# EAGLE board Board2 (EAGLE 7.5.0)
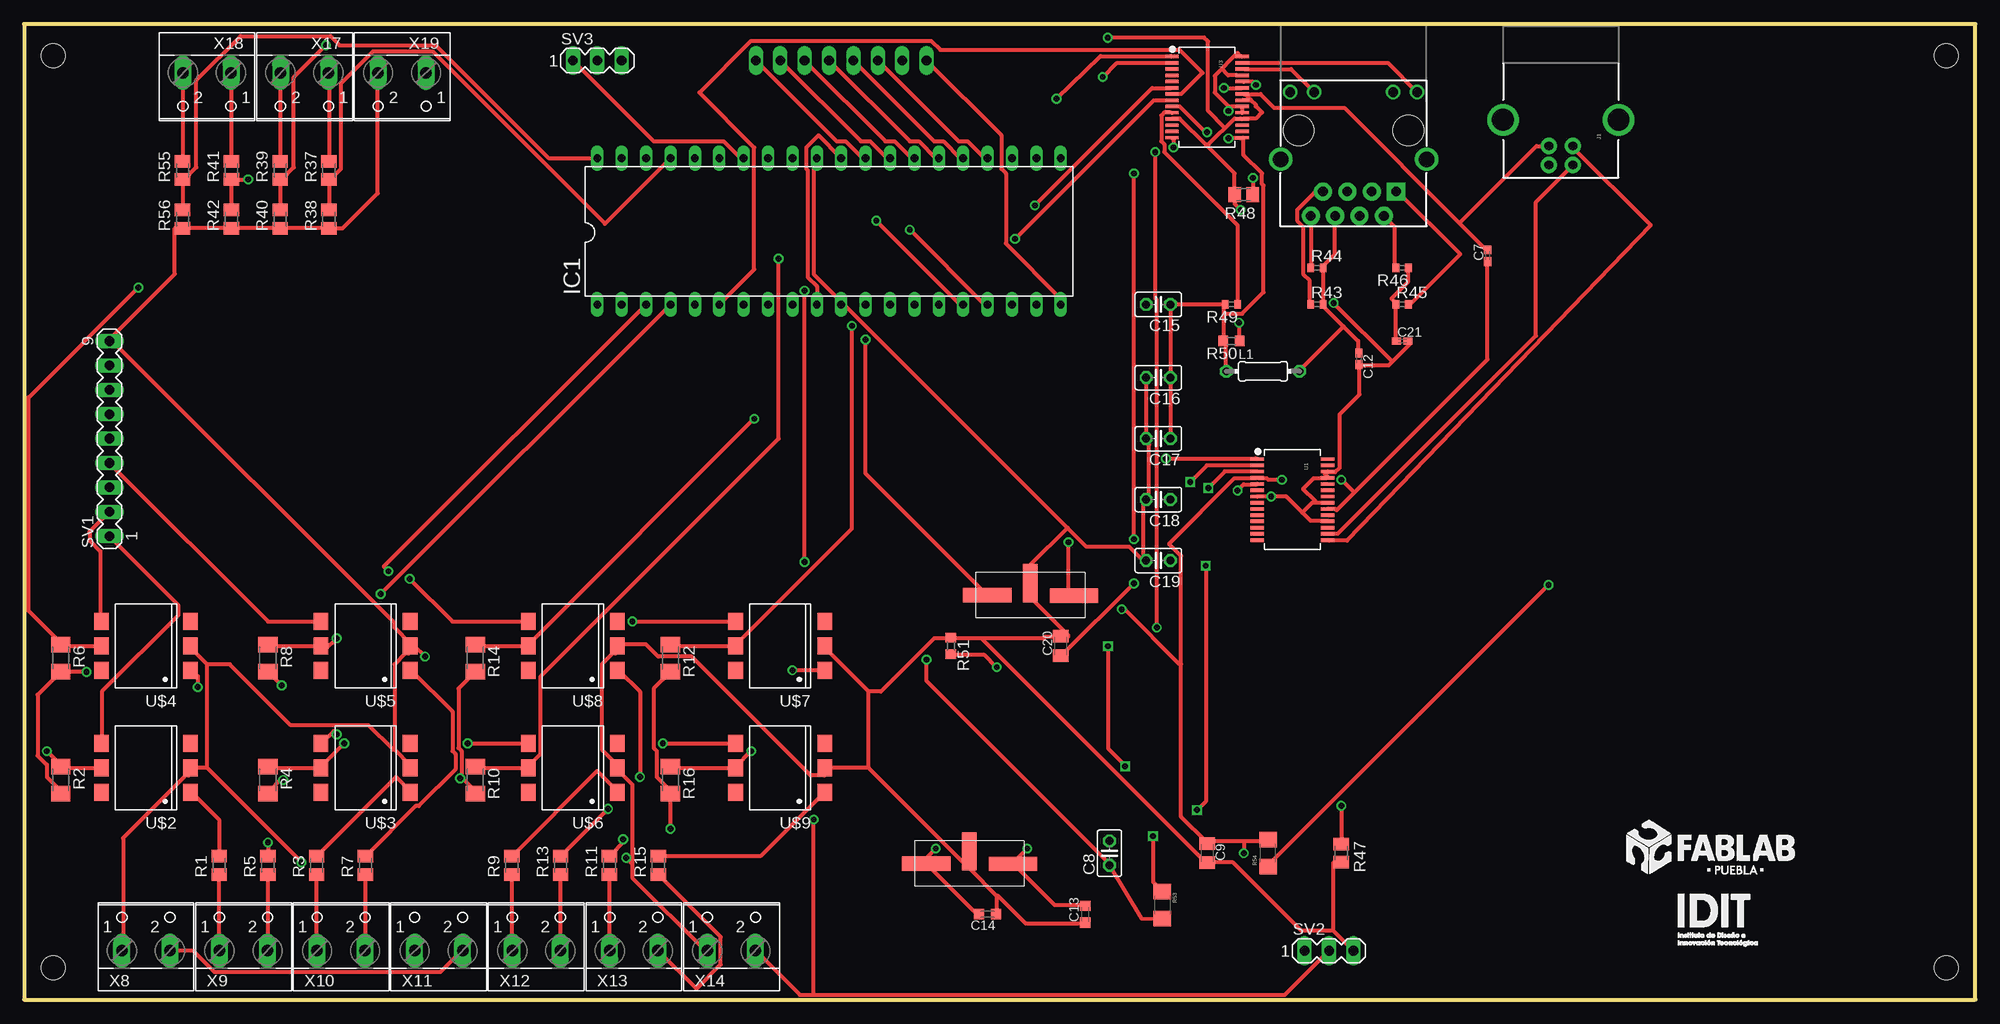
[diagram p0: board, top side]
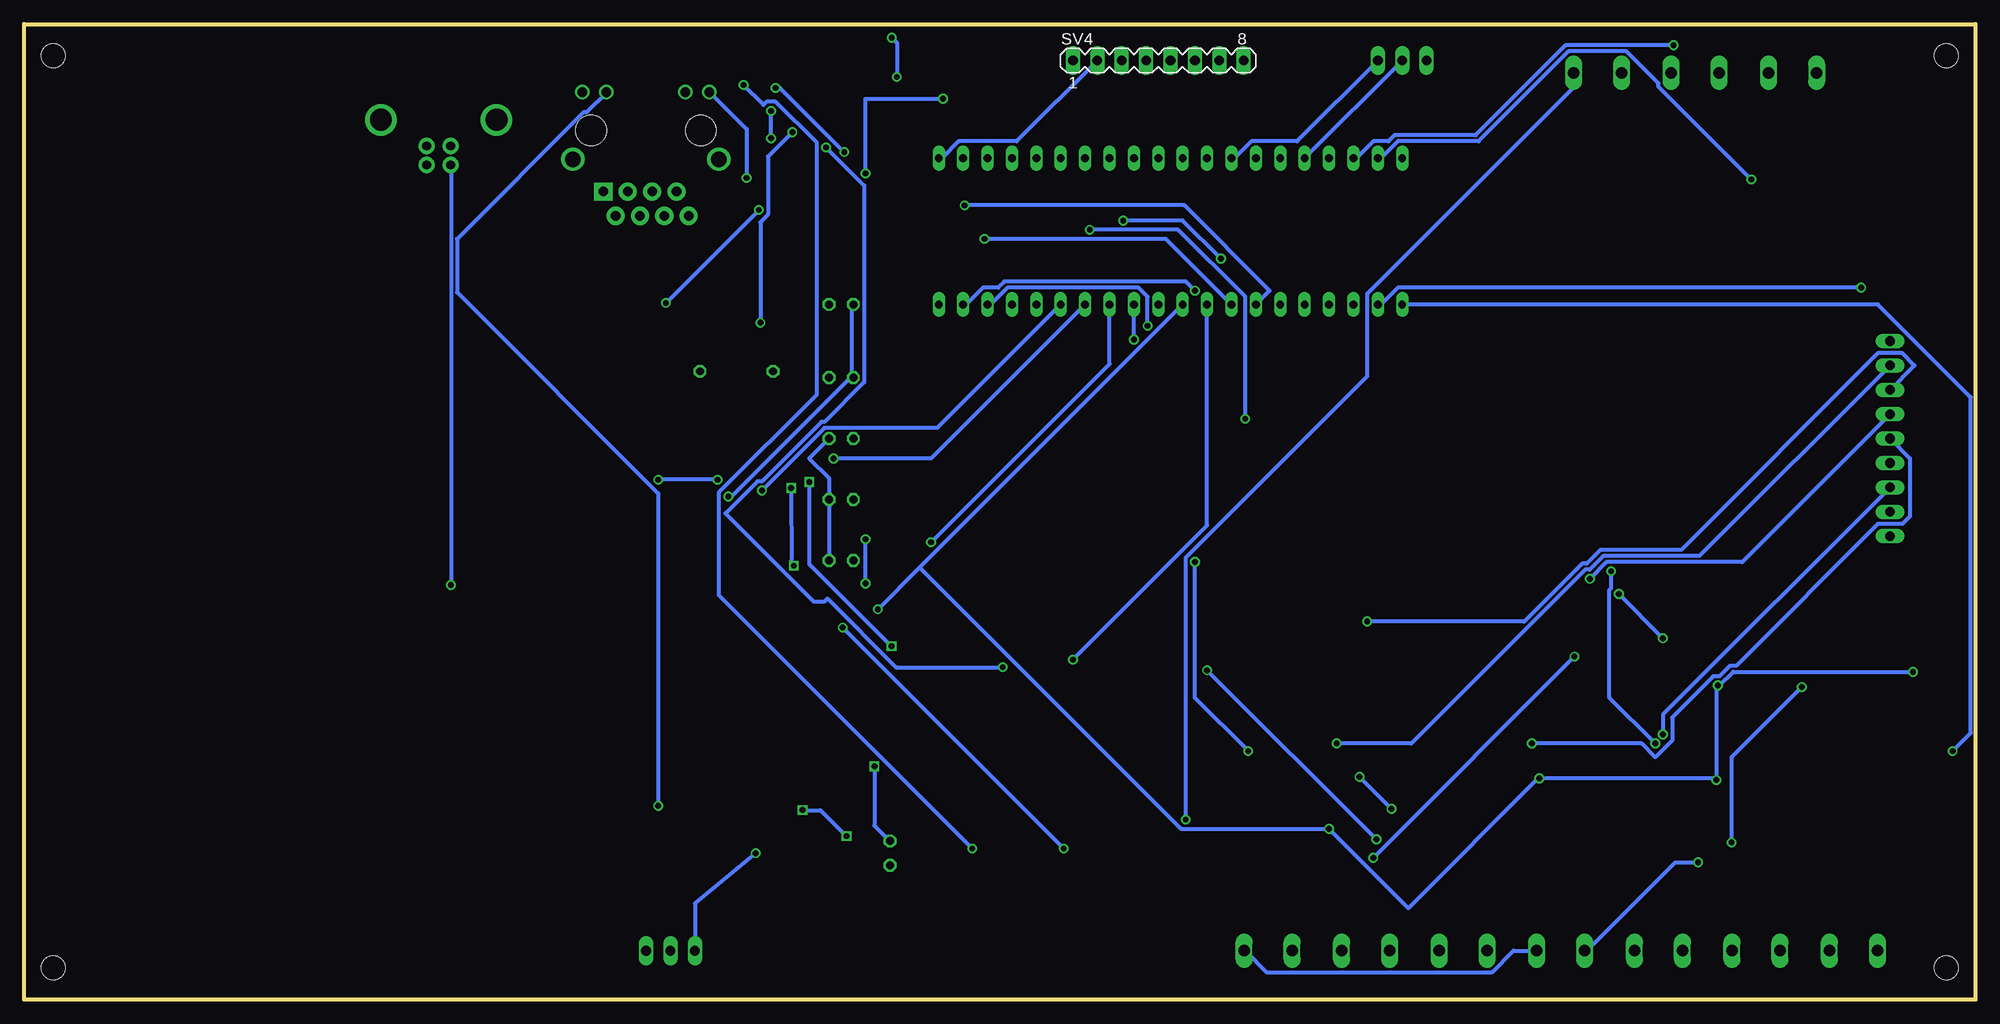
[diagram p1: board, bottom side, seen from below]

Size 203.2 x 101.6 mm. Coordinates in mm from the lower left corner, seen from the top.
Outline: 0,0 203.2,0 203.2,101.6 0,101.6 0,0
Copper layers (1*16): Top 0.035mm / dielectric 1.5mm / Bottom 0.035mm
Design rules "default *": minimum track width 16mil, minimum drill 24mil, track to track 8mil, track to pad 8mil, pad to pad 8mil, via to via 8mil, smd to smd 8mil, copper to edge 2mil, drill to drill 8mil, minimum pad ring 10mil, minimum via ring 8mil, stop-mask expansion 4mil, vias tented up to drill 0mil, thermal gap 10mil
Holes 2.5 mm at 3.05,3.3 3.05,98.3 200.15,3.3 200.15,98.3

## Footprints (pad centres in the part's own frame; a part is rotated, then mirrored left to right if it is on the bottom)
C0402K = smd 0.925 x 0.74: 1 -0.6,0; 2 0.6,0
C025-025X050 = drill 0.813 octagon: 1 -1.27,0; 2 1.27,0
C0805K = smd 1.3 x 1.6: 1 -1,0; 2 1,0
C0603K = smd 1.05 x 1.08: 1 -0.875,0; 2 0.875,0
SMDCRYSTAL = smd 5 x 1.5: 1 1.15,2.38; 2 10.19,2.35 | smd 1.5 x 4: GND 5.7,1.08
DIL40 = drill 0.813 long: 1 -24.13,-7.62; 2 -21.59,-7.62; 3 -19.05,-7.62; 4 -16.51,-7.62; 5 -13.97,-7.62; 6 -11.43,-7.62; 7 -8.89,-7.62; 8 -6.35,-7.62; 9 -3.81,-7.62; 10 -1.27,-7.62; 11 1.27,-7.62; 12 3.81,-7.62; 13 6.35,-7.62; 14 8.89,-7.62; 15 11.43,-7.62; 16 13.97,-7.62; 17 16.51,-7.62; 18 19.05,-7.62; 19 21.59,-7.62; 20 24.13,-7.62; 21 24.13,7.62; 22 21.59,7.62; 23 19.05,7.62; 24 16.51,7.62; 25 13.97,7.62; 26 11.43,7.62; 27 8.89,7.62; 28 6.35,7.62; 29 3.81,7.62; 30 1.27,7.62; 31 -1.27,7.62; 32 -3.81,7.62; 33 -6.35,7.62; 34 -8.89,7.62; 35 -11.43,7.62; 36 -13.97,7.62; 37 -16.51,7.62; 38 -19.05,7.62; 39 -21.59,7.62; 40 -24.13,7.62
USB-B-PTH = drill 0.914 pad 1.676: D+ 0,1.25; D- 1.981,1.25; GND 0,-1.25; VBUS 1.981,-1.25 | drill 2.286: S1 -2.718,-6.02; S2 -2.718,6.02
MAGJACK = drill 1 pad 1.88 square: 1 3.175,17.445 | drill 1 pad 1.88: 2 4.445,19.985; 3 5.715,17.445; 4 6.985,19.985; 5 8.255,17.445; 6 9.525,19.985; 7 10.795,17.445; 8 12.065,19.985 | drill 1 pad 1.27: 9 1,7.1; 10 3.5,7.1; 11 11.7,7.1; 12 14.2,7.1 | drill 1.6 pad 2.184: M1 0,14.1; M2 15.2,14.1 | hole 3.2: 1.905,11.095; 13.335,11.095
0204/7 = drill 0.813 octagon: 1 -3.81,0; 2 3.81,0
M0805 = smd 1.3 x 1.6: 1 -0.95,0; 2 0.95,0
M1206 = smd 1.6 x 2: 1 -1.4,0; 2 1.4,0
R0402 = smd 0.7 x 0.9: 1 -0.65,0; 2 0.65,0
R0603 = smd 1 x 1.1: 1 -0.85,0; 2 0.85,0
1206 = smd 1.6 x 1.8: 1 -1.4,0; 2 1.4,0
MA09-1 = drill 1.016 long: 1 -10.16,0; 2 -7.62,0; 3 -5.08,0; 4 -2.54,0; 5 0,0; 6 2.54,0; 7 5.08,0; 8 7.62,0; 9 10.16,0
MA03-1 = drill 1.016 long: 1 -2.54,0; 2 0,0; 3 2.54,0
MA08-1 = drill 1.016 long: 1 -8.89,0; 2 -6.35,0; 3 -3.81,0; 4 -1.27,0; 5 1.27,0; 6 3.81,0; 7 6.35,0; 8 8.89,0
SSOP28DB = smd 0.348 x 1.397: 1 -4.225,-3.656; 2 -3.575,-3.656; 3 -2.925,-3.656; 4 -2.275,-3.656; 5 -1.625,-3.656; 6 -0.975,-3.656; 7 -0.325,-3.656; 8 0.325,-3.656; 9 0.975,-3.656; 10 1.625,-3.656; 11 2.275,-3.656; 12 2.925,-3.656; 13 3.575,-3.656; 14 4.225,-3.656; 15 4.225,3.656; 16 3.575,3.656; 17 2.925,3.656; 18 2.275,3.656; 19 1.625,3.656; 20 0.975,3.656; 21 0.325,3.656; 22 -0.325,3.656; 23 -0.975,3.656; 24 -1.625,3.656; 25 -2.275,3.656; 26 -2.925,3.656; 27 -3.575,3.656; 28 -4.225,3.656
DIL6-SMD = smd 1.78 x 1.52: 1 -2.54,-4.645; 2 0,-4.645; 3 2.54,-4.645; 4 2.54,4.645; 5 0,4.645; 6 -2.54,4.645
W237-102 = drill 1.194 long: 1 -2.5,-1.27; 2 2.5,-1.27

## Placement (x,y rotation side)
C7  .1uF  [C0402K]  152.4,77.47 90 top
C8  100nF  [C025-025X050]  113.03,15.24 90 top
C9  10uF  [C0805K]  123.19,15.24 270 top
C12  10nF  [C0402K]  139.01,66.73 270 top
C13  10pF  [C0603K]  110.49,8.89 90 top
C14  10pF  [C0603K]  100.33,8.89 180 top
C15  [C025-025X050]  118.11,72.39 180 top
C16  100nF  [C025-025X050]  118.11,64.77 180 top
C17  100nF  [C025-025X050]  118.11,58.42 180 top
C18  100nF  [C025-025X050]  118.11,52.07 180 top
C19  100nF  [C025-025X050]  118.11,45.72 180 top
C20  10uF  [C0805K]  107.95,36.83 90 top
C21  10nF  [C0402K]  143.51,68.58 0 top
CRYSTAL  16MHz  [SMDCRYSTAL]  110.49,44.45 180 top
CRYSTAL2  25MHz  [SMDCRYSTAL]  104.14,16.51 180 top
IC1  [DIL40]  83.82,80.01 0 top
J1  USB-B  [USB-B-PTH]  160.02,88.9 270 top
J2  MAGJACK  [MAGJACK]  146.05,101.6 180 top
L1  10uH  [0204/7]  129.01,65.43 0 top
R1  470Ω  [M0805]  20.32,13.97 90 top
R2  4.7kΩ  [M1206]  3.81,22.86 270 top
R3  470Ω  [M0805]  30.48,13.97 90 top
R4  4.7kΩ  [M1206]  25.4,22.86 270 top
R5  470Ω  [M0805]  25.4,13.97 90 top
R6  4.7kΩ  [M1206]  3.81,35.56 270 top
R7  470Ω  [M0805]  35.56,13.97 90 top
R8  4.7kΩ  [M1206]  25.4,35.56 270 top
R9  470Ω  [M0805]  50.8,13.97 90 top
R10  4.7kΩ  [M1206]  46.99,22.86 270 top
R11  470Ω  [M0805]  60.96,13.97 90 top
R12  4.7kΩ  [M1206]  67.31,35.56 270 top
R13  470Ω  [M0805]  55.88,13.97 90 top
R14  4.7kΩ  [M1206]  46.99,35.56 270 top
R15  470Ω  [M0805]  66.04,13.97 90 top
R16  4.7kΩ  [M1206]  67.31,22.86 270 top
R37  1.8kΩ  [M0805]  31.75,86.36 90 top
R38  470Ω  [M0805]  31.75,81.28 90 top
R39  1.8kΩ  [M0805]  26.67,86.36 90 top
R40  470Ω  [M0805]  26.67,81.28 90 top
R41  1.8kΩ  [M0805]  21.59,86.36 90 top
R42  470Ω  [M0805]  21.59,81.28 90 top
R43  49.9/1%  [R0402]  134.62,72.39 0 top
R44  49.9/1%  [R0402]  134.62,76.2 0 top
R45  49.9/1%  [R0402]  143.51,72.39 0 top
R46  49.9/1%  [R0402]  143.51,76.2 180 top
R47  180Ω  [M0805]  137.16,15.24 270 top
R48  180Ω  [M0805]  127,83.82 180 top
R49  10kΩ  [R0402]  125.73,72.39 180 top
R50  100kΩ  [R0603]  125.73,68.58 180 top
R51  2k/1%  [R0603]  96.52,36.83 270 top
R53  100  [1206]  118.52,9.83 270 top
R54  0.0  [1206]  129.54,15.24 90 top
R55  1.8kΩ  [M0805]  16.51,86.36 90 top
R56  470Ω  [M0805]  16.51,81.28 90 top
SV1  [MA09-1]  8.89,58.42 90 top
SV2  [MA03-1]  135.89,5.08 0 top
SV3  [MA03-1]  59.69,97.79 0 top
SV4  [MA08-1]  85.09,97.79 0 bottom
U1  FT232RLSSOP  [SSOP28DB]  132.08,52.07 270 top
U3  [SSOP28DB]  123.19,93.98 270 top
U$2  CNY17SMD  [DIL6-SMD]  12.7,24.13 90 top
U$3  CNY17SMD  [DIL6-SMD]  35.56,24.13 90 top
U$4  CNY17SMD  [DIL6-SMD]  12.7,36.83 90 top
U$5  CNY17SMD  [DIL6-SMD]  35.56,36.83 90 top
U$6  CNY17SMD  [DIL6-SMD]  57.15,24.13 90 top
U$7  CNY17SMD  [DIL6-SMD]  78.74,36.83 90 top
U$8  CNY17SMD  [DIL6-SMD]  57.15,36.83 90 top
U$9  CNY17SMD  [DIL6-SMD]  78.74,24.13 90 top
X8  [W237-102]  12.7,6.35 0 top
X9  [W237-102]  22.86,6.35 0 top
X10  [W237-102]  33.02,6.35 0 top
X11  [W237-102]  43.18,6.35 0 top
X12  [W237-102]  53.34,6.35 0 top
X13  [W237-102]  63.5,6.35 0 top
X14  [W237-102]  73.66,6.35 0 top
X17  [W237-102]  29.21,95.25 180 top
X18  [W237-102]  19.05,95.25 180 top
X19  [W237-102]  39.37,95.25 180 top

## Library data of the parts
C7-C9 C12-C21 L1 R1-R16 R37-R51 R55 R56 = resistor
CRYSTAL CRYSTAL2 = crystal
IC1 = 1284p
J1 = SparkFun-Connectors; PROD_ID: CONN-08278
J2 = SparkFun-Connectors
R53 R54 = SparkFun-Resistors
SV1-SV4 = con-lstb; OC_FARNELL: unknown; OC_NEWARK: unknown
U1 = SparkFun-DigitalIC; PROD_ID: IC-00870
U3 = SparkFun-DigitalIC
U$2-U$9 = optocoupler
X8-X14 X17-X19 = con-wago-500; MPN: 237-102; OC_FARNELL: unknown; OC_NEWARK: 70K9898

## Nets
3.3V: C15.1 C16.1 C17.1 C18.1 C19.1 L1.1 R49.2 R50.2 U3.15 U3.19 U3.20 U3.28
5V: C7.1 C9.1 IC1.10 IC1.30 R2.2 R4.2 R6.2 R8.2 R10.2 R12.2 R14.2 R16.2 R54.2 SV2.1 U1.4 U1.20
24V: SV2.2 X8.2 X11.2 X14.2 X19.1
A0: R37.2 X17.1
A1: R39.2 X17.2
A2: R41.2 X18.1
A3: R55.2 X18.2
AA0: IC1.37 R37.1 R38.2
AA1: IC1.38 R39.1 R40.2
AA2: IC1.39 R41.1 R42.2
AA3: IC1.40 R55.1 R56.2
CLKOUT: U3.3
CS: R50.1 U3.9
CTS: U1.11
DI0: IC1.1 R2.1 U$2.5
DI1: IC1.2 R6.1 U$4.5
DI2: IC1.3 R4.1 U$3.5
DI3: IC1.4 R8.1 U$5.5
DI4: IC1.16 R10.1 U$6.5
DI5: IC1.17 R14.1 U$8.5
DI6: IC1.18 R12.1 U$7.5
DI7: IC1.19 R16.1 U$9.5
DO0: IC1.20 SV4.1
DO1: IC1.21 SV4.2
DO2: IC1.24 SV4.3
DO3: IC1.25 SV4.4
DO4: IC1.26 SV4.5
DO5: IC1.27 SV4.6
DO6: IC1.28 SV4.7
DO7: IC1.29 SV4.8
GND: C7.2 C9.2 C12.2 C13.1 C14.1 C15.2 C16.2 C17.2 C18.2 C19.2 C20.2 C21.2 CRYSTAL2.GND CRYSTAL.GND IC1.11 IC1.31 J1.GND R38.1 R40.1 R42.1 R47.2 R48.2 R51.1 R56.1 SV1.9 SV2.3 U1.7 U1.18 U1.21 U1.25 U1.26 U3.11 U3.18 U3.21 U3.22 U$2.2 U$3.2 U$4.2 U$5.2 U$6.2 U$7.2 U$8.2 U$9.2 X8.1 X11.1 X14.1 X19.2
IN0: R1.1 X9.1
IN1: R5.1 X9.2
IN2: R3.1 X10.1
IN3: R7.1 X10.2
IN4: R9.1 X12.1
IN5: R13.1 X12.2
IN6: R11.1 X13.1
IN7: R15.1 X13.2
INT: U3.4
LEDI0: SV1.1 U$2.4
LEDI1: SV1.2 U$4.4
LEDI2: SV1.3 U$3.4
LEDI3: SV1.4 U$5.4
LEDI4: SV1.5 U$6.4
LEDI5: SV1.6 U$8.4
LEDI6: SV1.7 U$7.4
LEDI7: SV1.8 U$9.4
MISO: IC1.7 U3.6
MOSI: IC1.6 U3.7
N$3: CRYSTAL.1 IC1.13
N$8: CRYSTAL.2 IC1.12
N$9: R1.2 U$2.1
N$10: R3.2 U$3.1
N$11: R5.2 U$4.1
N$12: R7.2 U$5.1
N$13: R9.2 U$6.1
N$14: R11.2 U$7.1
N$15: R13.2 U$8.1
N$16: R15.2 U$9.1
N$37: J1.D+ U1.15
N$49: J2.7 R43.1
N$50: J2.8 R44.1
N$51: C12.1 J2.6 L1.2 R43.2 R44.2
N$52: J2.2 R46.2
N$53: J2.1 R45.2
N$54: C13.2 CRYSTAL2.1 U3.24
N$55: J2.10 R47.1
N$56: J2.12 R48.1
N$58: C14.2 CRYSTAL2.2 U3.23
N$59: C21.1 R45.1 R46.1
N$60: C8.1 IC1.9 R53.2
N$61: C20.1 U3.1
N$62: R51.2 U3.14
N$63: J1.VBUS R54.1
P0: IC1.34 SV3.1
P1: IC1.36 SV3.2
RST: R49.1 U3.10
RX0: IC1.15 U1.5
SCK: IC1.8 U3.8
SCL: IC1.22
SDA: IC1.23
SS: IC1.5
TPIN+: U3.13
TPIN-: U3.12
TPOUT+: U3.17
TPOUT-: U3.16
TX0: IC1.14 U1.1
Z0: IC1.33 SV3.3
Z1: IC1.35

## Tracks (layer width: path | path; a pad name or v marks a point on that pad's centre or on a via)
3.3V  (via drill 0.61)
  Top 0.406: C17.1 C16.1 C15.1 R49.2 124.94,72.39 124.94,71.44 | U3.19 126.84,92.39 126.84,92.87 U3.20 126.68,93.03 125.41,93.03 | 125.41,93.03 123.98,94.46 123.98,96.2 126.36,98.58 126.68,98.27 U3.28 | 124.94,71.44 124.94,68.58 R50.2 124.94,68.42 125.09,68.26 125.09,65.56 L1.1 | 124.94,71.44 126.84,71.44 129.06,73.66 129.06,84.77 128.91,84.93 128.91,86.04 127,87.95 127,89.69 U3.15 126.68,89.69 v125.41,89.69 | v125.41,92.55 125.41,93.03
  Bottom 0.406: C19.1 C18.1 119.38,54.29 121.44,56.36 C17.1 | v125.41,89.69 v125.41,92.55
5V  (via drill 0.61)
  Top 0.406: R2.2 3.81,21.75 2.38,23.18 2.38,24.45 1.43,25.4 1.43,31.75 3.81,34.13 R6.2 3.97,34.13 v6.51,34.13 | R12.2 67.31,34.13 65.56,32.38 65.56,26.19 65.88,25.88 65.88,23.18 67.31,21.75 R16.2 v67.31,17.78 | R10.2 46.99,21.75 45.64,23.1 | 45.64,23.1 45.56,23.18 45.56,25.88 45.24,26.19 45.24,32.38 46.99,34.13 R14.2 | v26.99,22.86 26.83,23.02 25.4,21.59 R4.2 | v26.83,32.7 25.4,34.13 R8.2 | v45.4,23.02 45.56,23.02 45.64,23.1 | C7.1 152.4,66.67 138.51,52.78 | 138.51,52.78 136.68,50.96 136.53,51.12 135.89,51.12 U1.20 | IC1.10 82.55,74.3 81.6,75.25 81.6,86.36 81.44,86.52 81.44,88.74 82.71,90.01 IC1.30 | 120.49,34.92 120.49,19.05 123.19,16.35 C9.1 123.19,16.51 127.01,16.51 | 120.49,34.92 120.49,46.2 119.22,47.47 126.05,54.29 128.27,54.29 U1.4 128.59,54.29 129.38,54.29 129.54,54.13 v130.97,54.13 | 127.01,16.51 129.54,16.51 R54.2 | 127.01,16.51 v127.01,15.24 | v114.3,40.64 114.62,40.64 120.33,34.92 120.49,34.92 | v137.16,54.13 138.51,52.78
  Bottom 0.406: v6.51,34.13 25.24,34.13 26.67,32.7 v26.83,32.7 26.99,32.54 v26.99,22.86 27.15,23.02 v45.4,23.02 45.56,23.02 59.05,9.53 v67.31,17.78 82.71,17.78 109.93,45.01 | SV2.1 133.35,10 v127.01,15.24 | v114.3,40.64 109.93,45.01 | 109.93,45.01 IC1.10 | v130.97,54.13 v137.16,54.13
24V  (via drill 0.61)
  Top 0.406: X8.2 17.62,5.08 19.84,2.86 43.34,2.86 45.56,5.08 X11.2 | SV2.2 131.29,0.48 82.23,0.48 | 82.23,0.48 80.8,0.48 76.2,5.08 X14.2 | 82.23,0.48 v82.23,18.73
  Bottom 0.406: v82.23,18.73 82.23,46.04 63.34,64.93 63.34,73.5 41.91,94.93 41.91,96.52 X19.1 | X11.2 48.1,5.08 50.32,2.86 73.82,2.86 76.04,5.08 X14.2
A0
  Top 0.406: R37.2 31.75,96.52 X17.1
A1
  Top 0.406: R39.2 26.67,96.52 X17.2
A2
  Top 0.406: R41.2 21.59,96.52 X18.1
A3
  Top 0.406: R55.2 16.51,96.52 X18.2
AA0
  Top 0.406: R38.2 R37.1 31.91,85.41 33.02,86.52 33.02,95.41 36.35,98.74 42.55,98.74 60.48,80.8 IC1.37
AA1  (via drill 0.61)
  Top 0.406: R40.2 R39.1 26.83,85.41 28.1,86.68 28.1,96.04 v31.43,99.38
  Bottom 0.406: IC1.38 64.45,87.63 62.71,89.38 61.12,89.38 60.48,90.01 52.07,90.01 42.7,99.38 v31.43,99.38
AA2  (via drill 0.61)
  Top 0.406: R42.2 R41.1 21.75,85.41 v23.34,85.41
  Bottom 0.406: IC1.39 61.91,87.63 60.17,89.38 51.75,89.38 42.39,98.74 36.35,98.74 33.02,95.41 33.02,95.09 v23.34,85.41
AA3
  Top 0.406: R56.2 R55.1 16.67,85.41 17.94,86.68 17.94,95.73 22.54,100.33 31.91,100.33 32.86,99.38 42.86,99.38 54.61,87.63 IC1.40
CS  (via drill 0.61)
  Top 0.406: v126.52,70.48 126.52,68.58 R50.1 | v123.19,90.33 123.03,90.33 120.33,93.03 119.54,93.03 U3.9
  Bottom 0.406: v126.52,70.48 126.52,80.96 125.73,81.76 125.73,87.79 v123.19,90.33
DI0  (via drill 0.61)
  Top 0.406: U$2.5 3.81,24.13 R2.1 3.81,24.45 v2.38,25.88
  Bottom 0.406: IC1.1 10.16,72.39 0.48,62.71 0.48,27.78 v2.38,25.88
DI1  (via drill 0.61)
  Top 0.406: U$4.5 3.81,36.83 R6.1 3.81,37.15 0.48,40.48 0.48,62.71 v11.91,74.14
  Bottom 0.406: IC1.2 61.91,72.39 60.17,74.14 v11.91,74.14
DI2  (via drill 0.61)
  Top 0.406: R4.1 25.4,24.13 U$3.5 30.96,24.29 v33.34,26.67 | IC1.3 37.47,45.09 v37.94,44.61
  Bottom 0.406: v37.94,44.61 37.94,42.86 38.1,42.7 38.1,31.43 v33.34,26.67
DI3  (via drill 0.61)
  Top 0.406: R8.1 25.4,36.83 U$5.5 31.11,36.83 31.43,36.51 v32.54,37.62 | v37.15,42.23 IC1.4
  Bottom 0.406: v32.54,37.62 v37.15,42.23
DI4  (via drill 0.61)
  Top 0.406: R10.1 46.99,24.13 U$6.5 52.55,24.29 53.82,25.56 53.82,33.66 78.58,58.42 v78.58,77.15 | IC1.16 97.47,72.39 v88.74,81.12
  Bottom 0.406: v88.74,81.12 82.55,81.12 v78.58,77.15
DI5  (via drill 0.61)
  Top 0.406: R14.1 46.99,36.83 U$8.5 52.55,36.99 v76.04,60.48 | IC1.17 100.01,72.39 v92.23,80.17
  Bottom 0.406: v92.23,80.17 83.03,80.17 76.04,73.18 v76.04,60.48
DI6  (via drill 0.61)
  Top 0.406: R12.1 67.31,36.83 U$7.5 74.14,36.99 86.2,49.05 v86.2,70.17
  Bottom 0.406: IC1.18 102.55,72.39 100.81,74.14 87.15,74.14 86.2,73.18 v86.2,70.17
DI7  (via drill 0.61)
  Top 0.406: R16.1 67.31,24.13 U$9.5 74.14,24.29 v75.72,25.88 | v81.28,45.56 v81.28,73.82
  Bottom 0.406: IC1.19 105.09,72.39 103.35,74.14 101.76,74.14 101.12,74.77 82.23,74.77 v81.28,73.82 | v81.28,45.56 81.28,31.43 v75.72,25.88
DO0
  Top 0.406: IC1.20 107.95,73.03 102.23,78.74 102.23,86.04 101.76,86.52 101.76,90.01 SV4.1
DO1
  Bottom 0.406: IC1.21 107.63,87.63 105.89,89.38 99.85,89.38 SV4.2
DO2
  Top 0.406: IC1.24 100.01,87.63 98.27,89.38 97.31,89.38 SV4.3
DO3
  Top 0.406: IC1.25 97.47,87.63 95.73,89.38 94.77,89.38 SV4.4
DO4
  Top 0.406: IC1.26 94.93,87.63 93.19,89.38 92.23,89.38 SV4.5
DO5
  Top 0.406: IC1.27 92.39,87.63 90.65,89.38 89.69,89.38 SV4.6
DO6
  Top 0.406: IC1.28 89.85,87.63 88.11,89.38 87.15,89.38 SV4.7
DO7
  Top 0.406: IC1.29 87.31,87.63 85.57,89.38 84.61,89.38 SV4.8
GND  (via drill 0.61)
  Top 0.406: 19.05,24.13 U$2.2 17.3,23.97 17.3,23.5 17.14,23.34 16.83,23.34 10.32,16.83 10.32,5.08 X8.1 | v28.89,14.29 19.05,24.13 | 19.05,34.92 17.3,36.67 17.3,36.83 U$4.2 | 19.05,24.13 19.05,34.92 | X14.1 70.96,5.08 63.34,12.7 63.34,14.29 | 63.34,14.29 63.34,22.38 61.91,23.81 61.75,23.81 61.75,23.97 U$6.2 61.91,24.13 61.75,24.29 61.75,24.45 60.17,26.04 60.17,34.92 61.28,36.04 61.59,36.04 61.75,36.2 61.75,36.83 U$8.2 61.91,36.99 64.77,36.99 66.04,35.72 69.53,35.72 81.92,23.34 83.34,23.34 83.34,23.97 U$9.2 87.95,24.13 | X19.2 36.83,96.52 36.83,83.98 33.18,80.33 31.91,80.33 R38.1 26.83,80.33 26.67,80.49 R40.1 26.51,80.33 21.75,80.33 R42.1 16.67,80.33 16.51,80.49 R56.1 16.35,80.33 15.72,80.33 15.72,75.56 9.05,68.9 SV1.9 9.05,68.74 38.58,39.21 38.58,38.73 40.32,36.99 U$5.2 | 38.58,26.04 40.16,24.45 40.16,24.29 40.32,24.13 U$3.2 | 38.58,26.04 38.58,34.92 39.69,36.04 40.01,36.04 40.16,36.2 40.16,36.83 U$5.2 | v62.71,14.76 63.18,14.29 63.34,14.29 | v41.75,35.72 40.48,36.99 U$5.2 | 19.05,34.92 21.43,34.92 27.78,28.57 35.88,28.57 38.42,26.04 38.58,26.04 | 101.28,10.79 101.28,8.89 C14.1 | 101.28,10.79 98.42,13.65 98.42,15.4 CRYSTAL2.GND 98.27,13.81 87.95,24.13 | C13.1 110.49,7.94 104.3,7.94 101.44,10.79 101.28,10.79 | 87.95,32.07 83.34,36.67 83.34,36.83 U$7.2 | 87.95,24.13 87.95,32.07 | 99.85,37.62 106.2,37.62 106.36,37.78 107.95,37.78 C20.2 108.11,37.94 108.27,37.78 108.74,37.78 108.74,37.94 104.78,41.91 104.78,43.34 CRYSTAL.GND 104.93,43.5 104.78,43.66 104.78,45.24 108.66,49.13 | 99.85,37.62 96.68,37.62 96.52,37.78 R51.1 96.36,37.62 94.77,37.62 89.22,32.07 87.95,32.07
  Top 0.406: 136.37,7.14 133.03,7.14 125.89,14.29 123.19,14.29 C9.2 123.03,14.13 122.87,14.29 122.87,14.45 99.85,37.47 99.85,37.62 | SV2.3 136.37,7.14 | 136.37,7.14 136.37,14.29 R47.2 | 149.46,80.88 137.48,92.87 130.18,92.87 128.75,94.3 127,94.3 U3.22 127.32,94.14 127.71,93.74 | 149.46,80.88 152.4,77.95 C7.2 | 127.71,93.74 128.27,93.19 128.27,93.03 128.91,92.39 128.27,91.76 127,91.76 U3.18 126.68,91.76 126.05,91.76 123.35,89.06 123.19,89.06 123.11,88.98 | U3.21 127,93.66 127.64,93.66 127.71,93.74 | J1.GND 157.48,88.9 149.46,80.88 | 142.48,66.44 144.3,68.26 143.99,68.58 C21.2 | 142.48,66.44 142.08,66.04 139.22,66.04 139.06,66.2 C12.2 138.91,66.04 139.06,65.88 139.06,63.02 137,60.96 137,55.4 136.53,54.93 135.89,54.93 U1.26 135.73,54.93 135.57,54.93 135.41,54.77 135.73,54.45 U1.25 135.57,54.29 134.3,54.29 133.19,53.18 134.46,51.91 134.46,51.75 | 123.11,88.98 126.05,86.04 126.05,83.98 126.21,83.82 R48.2 126.05,83.66 126.05,82.87 v126.68,82.23 | 123.11,88.98 120.33,91.76 119.54,91.76 U3.11 | v136.37,72.55 142.48,66.44 | 85.25,72.55 82.23,75.56 82.23,87.31 IC1.31 | 133.11,50.72 133.99,49.85 135.73,49.85 U1.18 | 133.11,50.72 131.44,52.39 v129.86,52.39 128.43,52.39 U1.7 | 134.46,51.75 134.14,51.75 133.11,50.72 | 134.46,51.75 135.73,51.75 U1.21 | C16.2 116.52,64.45 116.84,64.14 C17.2 116.68,58.26 117.16,57.78 117.16,52.39 117,52.23 116.84,52.23 C18.2 116.52,51.75 116.52,46.35 117,45.88 C19.2 116.84,45.56 116.68,45.56 115.09,47.15 110.65,47.15 108.66,49.13 | 108.66,49.13 85.25,72.55 | 85.25,72.55 IC1.11
  Bottom 0.406: v28.89,14.29 31.27,14.29 40.48,5.08 X11.1 | v41.75,35.72 v62.71,14.76 | v126.68,82.23 v136.37,72.55 | v129.86,52.39 129.54,52.39 117,64.93 C16.2 117,65.09 117,71.91 116.68,72.23 C15.2
IN0
  Top 0.406: R1.1 20.32,5.08 X9.1
IN1
  Top 0.406: R5.1 25.4,5.08 X9.2
IN2
  Top 0.406: R3.1 30.48,5.08 X10.1
IN3
  Top 0.406: R7.1 35.56,5.08 X10.2
IN4
  Top 0.406: R9.1 50.8,5.08 X12.1
IN5
  Top 0.406: R13.1 55.88,5.08 X12.2
IN6
  Top 0.406: R11.1 60.96,5.08 X13.1
IN7
  Top 0.406: R15.1 72.55,6.51 72.55,3.65 70.01,1.11 66.04,5.08 X13.2
LEDI0
  Top 0.406: SV1.1 16.03,41.12 16.03,40.01 8.1,32.07 8.1,26.67 U$2.4
LEDI1
  Top 0.406: SV1.2 6.83,48.74 6.83,47.78 7.94,46.67 7.94,39.37 U$4.4
LEDI2  (via drill 0.61)
  Top 0.406: v32.54,27.62 32.23,27.94 30.96,26.67 U$3.4
  Bottom 0.406: v32.54,27.62 32.54,29.69 SV1.3
LEDI3
  Top 0.406: U$5.4 25.4,39.37 SV1.4
LEDI4  (via drill 0.61)
  Top 0.406: v46.2,26.67 U$6.4
  Bottom 0.406: v46.2,26.67 34.77,26.67 33.34,25.24 31.59,26.99 31.59,29.37 27.3,33.66 26.67,33.66 25.56,34.77 24.92,34.77 10.16,49.53 7.62,49.53 6.83,50.32 6.83,56.36 SV1.5
LEDI5  (via drill 0.61)
  Top 0.406: U$8.4 44.61,39.37 v40.16,43.81
  Bottom 0.406: v40.16,43.81 38.42,45.56 24.29,45.56 SV1.6
LEDI6  (via drill 0.61)
  Top 0.406: v63.34,39.37 U$7.4
  Bottom 0.406: v63.34,39.37 46.99,39.37 40.96,45.4 40.48,45.4 39.05,46.83 30.64,46.83 10.16,67.31 7.62,67.31 6.35,66.04 SV1.7
LEDI7  (via drill 0.61)
  Top 0.406: v66.52,26.67 U$9.4
  Bottom 0.406: v66.52,26.67 58.74,26.67 40.64,44.77 40.16,44.77 38.73,46.2 28.73,46.2 SV1.8
MISO  (via drill 0.61)
  Top 0.406: v105.25,82.71 117.47,94.93 119.38,94.93 U3.6
  Bottom 0.406: v105.25,82.71 82.39,82.71 73.5,73.82 IC1.7
MOSI
  Top 0.406: IC1.6 76.04,76.04 76.04,88.74 70.33,94.46 75.72,99.85 94.46,99.85 95.41,98.9 120.33,98.9 122.71,96.52 120.49,94.3 119.54,94.3 U3.7
N$1
  Top 0.406: 135.84,48.51 136.8,48.51 157.43,69.14 157.43,83.06 161.29,86.92
N$2
  Top 0.406: 126.31,96.27 125.37,96.27 124.71,96.93
N$3  (via drill 0.61)
  Top 0.406: v108.74,47.62 108.74,42.7 109.22,42.23 CRYSTAL.1
  Bottom 0.406: IC1.13 90.17,66.2 v108.74,47.62
N$4
  Top 0.406: 127.1,96.9 131.93,96.9 134.34,94.49
N$5
  Top 0.406: 126.85,97.56 142.01,97.56 145.06,94.51
N$6  (via drill 0.61)  (2 unrouted)
  Top 0.406: 128.4,55.63 123.17,55.63 v121.44,53.9 | 112.88,36.78 112.88,26.16 114.66,24.38
  Bottom 0.406: v121.44,53.9 121.44,45.34 112.88,36.78 | 114.66,24.38 v114.66,24.28 114.66,18.11 113.03,16.48
N$7  (via drill 0.61)
  other vias: 112.88,36.8
N$8  (via drill 0.61)
  Top 0.406: v87.63,68.74 87.63,54.77 100.17,42.23 CRYSTAL.2
  Bottom 0.406: v87.63,68.74 IC1.12
N$9
  Top 0.406: R1.2 20.32,18.73 17.46,21.59 U$2.1
N$10
  Top 0.406: R3.2 38.73,23.18 40.32,21.59 U$3.1
N$11  (via drill 0.61)
  Top 0.406: v25.4,16.35 R5.2 | v18.1,32.54 18.1,33.66 17.46,34.29 U$4.1
  Bottom 0.406: v25.4,16.35 25.4,25.24 v18.1,32.54
N$12
  Top 0.406: R7.2 40.8,20.16 41.12,20.16 44.93,23.97 44.93,25.56 44.61,25.88 44.61,30 40.32,34.29 U$5.1
N$13
  Top 0.406: R9.2 59.69,23.81 61.91,21.59 U$6.1
N$14  (via drill 0.61)
  Top 0.406: v62.39,16.67 62.55,16.51 R11.2 | U$7.1 v80.01,34.29
  Bottom 0.406: v80.01,34.29 v62.39,16.67
N$15  (via drill 0.61)
  Top 0.406: v60.8,19.84 R13.2 | v64.14,23.18 64.14,32.07 61.91,34.29 U$8.1
  Bottom 0.406: v64.14,23.18 v60.8,19.84
N$16
  Top 0.406: R15.2 76.68,14.92 83.34,21.59 U$9.1
N$17  (via drill 0.61)  (3 unrouted)
  Top 0.406: 128.42,54.99 125.04,54.99 v123.32,53.26 | 123.06,45.14 123.06,20.62 122.15,19.71 | 117.58,17.02 117.58,12.24 118.57,11.25
  Bottom 0.406: v123.32,53.26 123.29,45.36 123.06,45.14 | 122.15,19.71 120.27,19.71 117.58,17.02
N$18  (via drill 0.61)
  other vias: 117.55,17.02
N$19  (via drill 0.61)
  other vias: 122.12,19.74
N$20  (via drill 0.61)
  other vias: 123.04,45.19
N$37
  Top 0.406: U1.15 135.89,47.78 137.77,47.78 169.39,80.64 161.13,88.9 J1.D+
N$49
  Top 0.406: R43.1 133.83,72.39 133.83,74.93 133.19,75.56 133.19,80.49 132.56,81.12 132.56,82.23 134.94,84.61 135.25,84.3 J2.7
N$50
  Top 0.406: J2.8 133.99,76.2 R44.1
N$51
  Top 0.406: 137.4,70.09 135.25,72.23 R43.2 135.25,72.39 135.25,76.2 R44.2 135.25,76.36 136.53,77.63 J2.6 | 137.4,70.09 138.91,68.58 138.91,67.47 C12.1 | 137.4,70.09 132.87,65.56 L1.2
N$52
  Top 0.406: R46.2 142.72,76.2 142.72,80.49 141.6,81.6 J2.2
N$53
  Top 0.406: R45.2 144.3,72.39 149.54,77.63 142.88,84.3 J2.1
N$54  (via drill 0.61)
  Top 0.406: C13.2 110.49,9.84 107.31,9.84 103.03,14.13 CRYSTAL2.1 103.03,14.29 v104.46,15.72 | v128.27,95.25 127.95,95.57 127,95.57 U3.24
  Bottom 0.406: v128.27,95.25 126.21,93.19 125.89,93.5 124.94,93.5 120.65,89.22 120.65,63.02 130.81,52.86 130.81,42.07 v104.46,15.72
N$55  (via drill 0.61)
  Top 0.406: v137.16,20.16 R47.1
  Bottom 0.406: v137.16,20.16 137.16,52.7 158.12,73.66 158.12,79.22 144.94,92.39 144.62,92.39 142.56,94.46 J2.10
N$56  (via drill 0.61)
  Top 0.406: v127.95,85.57 R48.1
  Bottom 0.406: v127.95,85.57 127.95,90.65 131.76,94.46 J2.12
N$58  (via drill 0.61)
  Top 0.406: C14.2 99.22,8.89 93.98,14.13 CRYSTAL2.2 93.82,14.29 93.66,14.45 v94.93,15.72 | v124.94,94.93 126.84,94.93 U3.23 | v117.79,88.27 117.79,73.03 117.95,72.87 v117.95,38.73
  Bottom 0.406: v124.94,94.93 124.46,94.93 v117.79,88.27 | v94.93,15.72 v117.95,38.73
N$59
  Top 0.406: C21.1 142.88,68.58 142.88,72.39 R45.1 142.88,72.55 142.4,73.03 144.15,74.77 144.15,76.2 R46.1
N$60  (via drill 0.61)
  Top 0.406: R53.2 116.36,8.43 C8.1 113.03,14.13 93.98,33.18 v93.98,35.4
  Bottom 0.406: IC1.9 80.01,49.37 v93.98,35.4
N$61  (via drill 0.61)
  Top 0.406: v107.5,93.81 112.09,98.27 119.38,98.27 U3.1 | v115.57,47.94 v115.57,86.04 | v115.57,43.34 107.95,35.72 C20.1
  Bottom 0.406: v115.57,86.04 115.58,93.81 v107.5,93.81 | v115.57,43.34 v115.57,47.94
N$62  (via drill 0.61)
  Top 0.406: v101.28,34.61 100.01,35.88 96.52,35.88 R51.2 | v119.7,88.74 119.7,89.53 119.54,89.69 U3.14
  Bottom 0.406: v101.28,34.61 112.39,34.61 119.54,41.75 119.86,41.43 120.97,41.43 130.18,50.64 126.84,53.98 126.36,53.98 120.17,60.17 119.86,60.17 115.73,64.29 115.73,84.77 v119.7,88.74
N$63  (via drill 0.61)
  Top 0.406: v158.75,43.18 129.54,13.97 R54.1
  Bottom 0.406: v158.75,43.18 158.75,86.84 J1.VBUS
P0
  Top 0.406: IC1.34 74.61,87.63 72.87,89.38 65.56,89.38 SV3.1
P1
  Bottom 0.406: SV3.2 IC1.36
RST
  Top 0.406: R49.1 126.36,72.39 126.36,80.64 118.75,88.27 118.75,89.06 118.43,89.38 118.43,92.08 118.75,92.39 119.38,92.39 U3.10
RX0  (via drill 0.61)
  Top 0.406: v126.36,53.02 127,53.66 128.27,53.66 U1.5
  Bottom 0.406: v126.36,53.02 119.86,59.53 108.11,59.53 IC1.15
S$1  (2 unrouted)
  Top 0.406: 125.05,90.77 123.28,92.55 123.28,99.8 122.89,100.19 112.86,100.19 | 112.3,96.03 113.82,97.56 119.53,97.56
  Bottom 0.406: 112.86,100.19 112.3,99.63 112.3,96.03
S$2  (via drill 0.6)
  other vias: 112.32,96.09
S$3  (via drill 0.6)
  other vias: 112.84,100.18
SCK  (via drill 0.61)
  Top 0.406: v103.19,79.22 117.63,93.66 119.38,93.66 U3.8
  Bottom 0.406: v103.19,79.22 84.3,79.22 IC1.8
TX0  (via drill 0.61)
  Top 0.406: v118.9,56.36 128.27,56.36 U1.1
  Bottom 0.406: v118.9,56.36 108.74,56.36 IC1.14
Z0
  Bottom 0.406: IC1.33 77.15,87.63 75.41,89.38 70.64,89.38 SV3.3